# EAGLE board CT_schematic (EAGLE 7.6.0)

Size 100 x 80 mm. Coordinates in mm from the lower left corner, seen from the top.
Outline: 0,0 100,0 100,80 0,80 0,0
Copper layers (1*16): Top 0.035mm / dielectric 1.5mm / Bottom 0.035mm
Design rules "default": minimum track width 10mil, minimum drill 24mil, track to track 8mil, track to pad 8mil, pad to pad 8mil, via to via 8mil, smd to smd 8mil, copper to edge 40mil, drill to drill 8mil, minimum pad ring 10mil, minimum via ring 8mil, stop-mask expansion 4mil, vias tented up to drill 0mil, thermal gap 10mil

## Footprints (pad centres in the part's own frame; a part is rotated, then mirrored left to right if it is on the bottom)
C0603 = smd 0.8 x 0.8: 1 -0.762,0; 2 0.762,0
C0402 = smd 0.5 x 0.5: 1 -0.508,0; 2 0.508,0
C1210 = smd 1.2 x 2.5: 1 -1.524,0; 2 1.524,0
C0805 = smd 1.2 x 1.3: 1 -1.016,0; 2 1.016,0
EXV-9H = smd 3.505 x 1.676: 1 -2.857,0; 2 2.857,0
L1210 = smd 1.2 x 2.5: 1 -1.524,0; 2 1.524,0
PJ-037B_PACKAGE = drill 3.7 square: 1 12,0 | drill 3.2 square: 2 6,0
R0603 = smd 0.8 x 0.8: 1 -0.762,0; 2 0.762,0
LQFP64 = smd 0.3 x 1.2: 1 -3.75,-5.75; 2 -3.25,-5.75; 3 -2.75,-5.75; 4 -2.25,-5.75; 5 -1.75,-5.75; 6 -1.25,-5.75; 7 -0.75,-5.75; 8 -0.25,-5.75; 9 0.25,-5.75; 10 0.75,-5.75; 11 1.25,-5.75; 12 1.75,-5.75; 13 2.25,-5.75; 14 2.75,-5.75; 15 3.25,-5.75; 16 3.75,-5.75; 33 3.75,5.75; 34 3.25,5.75; 35 2.75,5.75; 36 2.25,5.75; 37 1.75,5.75; 38 1.25,5.75; 39 0.75,5.75; 40 0.25,5.75; 41 -0.25,5.75; 42 -0.75,5.75; 43 -1.25,5.75; 44 -1.75,5.75; 45 -2.25,5.75; 46 -2.75,5.75; 47 -3.25,5.75; 48 -3.75,5.75 | smd 1.2 x 0.3: 17 5.75,-3.75; 18 5.75,-3.25; 19 5.75,-2.75; 20 5.75,-2.25; 21 5.75,-1.75; 22 5.75,-1.25; 23 5.75,-0.75; 24 5.75,-0.25; 25 5.75,0.25; 26 5.75,0.75; 27 5.75,1.25; 28 5.75,1.75; 29 5.75,2.25; 30 5.75,2.75; 31 5.75,3.25; 32 5.75,3.75; 49 -5.75,3.75; 50 -5.75,3.25; 51 -5.75,2.75; 52 -5.75,2.25; 53 -5.75,1.75; 54 -5.75,1.25; 55 -5.75,0.75; 56 -5.75,0.25; 57 -5.75,-0.25; 58 -5.75,-0.75; 59 -5.75,-1.25; 60 -5.75,-1.75; 61 -5.75,-2.25; 62 -5.75,-2.75; 63 -5.75,-3.25; 64 -5.75,-3.75
SSOP-16 = smd 1.981 x 0.356: 1 -2.464,2.223; 2 -2.464,1.587; 3 -2.464,0.953; 4 -2.464,0.318; 5 -2.464,-0.318; 6 -2.464,-0.953; 7 -2.464,-1.587; 8 -2.464,-2.223; 9 2.464,-2.223; 10 2.464,-1.587; 11 2.464,-0.953; 12 2.464,-0.318; 13 2.464,0.318; 14 2.464,0.953; 15 2.464,1.587; 16 2.464,2.223
HTSS-105-01-G-D = drill 1 pad 1.8 square: 1 0,0 | drill 1 pad 1.8: 2 0,2.54; 3 2.54,0; 4 2.54,2.54; 5 5.08,0; 6 5.08,2.54; 7 7.62,0; 8 7.62,2.54; 9 10.16,0; 10 10.16,2.54
SOIC-8 = smd 1.6 x 0.6: 1 -2.7,1.905 | smd 1.55 x 0.6: 2 -2.7,0.635; 3 -2.7,-0.635; 4 -2.7,-1.905; 5 2.7,-1.905; 6 2.7,-0.635; 7 2.7,0.635; 8 2.7,1.905
182-009-MALE = drill 1.194 pad 1.524 octagon: 1 -5.537,10.923; 2 -2.769,10.923; 3 0,10.923; 4 2.769,10.923; 5 5.537,10.923; 6 -4.153,8.08; 7 -1.384,8.08; 8 1.384,8.08; 9 4.153,8.08 | hole 3.048: -12.446,9.501; 12.446,9.501
QFN-28 = smd 0.813 x 0.305: 1 -2.451,1.5; 2 -2.451,1; 3 -2.451,0.5; 4 -2.451,0; 5 -2.451,-0.5; 6 -2.451,-1; 7 -2.451,-1.5; 15 2.451,-1.5; 16 2.451,-1; 17 2.451,-0.5; 18 2.451,0; 19 2.451,0.5; 20 2.451,1; 21 2.451,1.5 | smd 0.305 x 0.813: 8 -1.5,-2.451; 9 -1,-2.451; 10 -0.5,-2.451; 11 0,-2.451; 12 0.5,-2.451; 13 1,-2.451; 14 1.5,-2.451; 22 1.5,2.451; 23 1,2.451; 24 0.5,2.451; 25 0,2.451; 26 -0.5,2.451; 27 -1,2.451; 28 -1.5,2.451 | smd 3.607 x 3.607: 29 0,0
SJ-43515TS-SMT-TR = smd 2.2 x 3: 1 0.6,-7.4; 4 3.4,-7.4 | smd 3 x 3: 2 12.8,-7.4; 5 17,-3 | smd 2 x 3: 3 5.3,0; 6 2.5,0 | drill 1.8: P$7 4.5,-3.69; P$8 11.54,-3.69
ABS07-32.768KHZ-7-T = smd 1.1 x 2.4: 1 -2.5,0; 2 0,0
ASFL1 = smd 1.7 x 1.5: 1 -1.27,-1.1; 2 1.27,-1.1; 3 1.27,1.1; 4 -1.27,1.1
SOIC-8_EP = smd 1.6 x 0.533: 1 -2.921,1.905; 2 -2.921,0.635; 3 -2.921,-0.635; 4 -2.921,-1.905; 5 2.921,-1.905; 6 2.921,-0.635; 7 2.921,0.635; 8 2.921,1.905 | smd 2.54 x 3.302: EPAD 0,0 | drill 0.406 pad 0.406: P$1 -0.508,0.635; P$2 0.381,0.635; P$3 -0.508,-0.635; P$4 0.381,-0.635
WSON-8 = smd 0.3 x 0.6: 1 -0.75,0; 2 0.05,0; 3 0.85,0; 4 1.65,0; 5 1.65,3.8; 6 0.85,3.8; 7 0.05,3.8; 8 -0.75,3.8 | smd 3 x 2.6: PAD 0.45,1.9
SON-6 = smd 0.55 x 0.3: 1 -0.355,0.5 | smd 0.52 x 0.3: 2 -0.37,0; 3 -0.37,-0.5; 4 0.37,-0.5; 5 0.37,0; 6 0.37,0.5
SW_4-1437565-2 = smd 1.4 x 2.1: 1 -2.23,4.55; 2 -2.23,-4.55; 3 2.23,4.55; 4 2.23,-4.55
LGM67K-G1J2-24-Z = smd 0.8 x 1.4: A -2,0; C 0,0
NC7SZ125M5X = smd 1.3 x 0.7: 1 -1.3,0.95; 2 -1.3,0; 3 -1.3,-0.95; 4 1.3,-0.95; 5 1.3,0.95
DUMMY_PACKAGE_176 = drill 0.3: 1 0,-1; 2 1.5,-1; 3 3,-1

## Placement (x,y rotation side)
C1  1e-06  [C0603]  -19.05,80.01 0 top  (outside the outline)
C2  1e-07  [C0603]  -22.86,80.01 0 top  (outside the outline)
C3  1e-07  [C0603]  -26.67,80.01 0 top  (outside the outline)
C4  1e-07  [C0603]  -30.48,80.01 0 top  (outside the outline)
C5  1e-07  [C0603]  -34.29,80.01 0 top  (outside the outline)
C6  1e-07  [C0603]  -38.1,80.01 0 top  (outside the outline)
C7  4.7e-06  [C0603]  -83.82,74.93 0 top  (outside the outline)
C8  1e-08  [C0603]  -41.91,80.01 0 top  (outside the outline)
C9  1e-06  [C0603]  -45.72,80.01 0 top  (outside the outline)
C10  1e-11  [C0402]  -26.67,85.09 0 top  (outside the outline)
C11  1e-11  [C0402]  -30.48,85.09 0 top  (outside the outline)
C12  1e-06  [C0603]  -49.53,80.01 0 top  (outside the outline)
C13  1e-06  [C0603]  -53.34,80.01 0 top  (outside the outline)
C14  2.2e-07  [C0603]  -15.24,80.01 0 top  (outside the outline)
C15  1e-06  [C0603]  -57.15,80.01 0 top  (outside the outline)
C16  1e-06  [C0603]  -60.96,80.01 0 top  (outside the outline)
C17  1e-06  [C0603]  -64.77,80.01 0 top  (outside the outline)
C18  1e-06  [C0603]  -68.58,80.01 0 top  (outside the outline)
C19  2.2e-05  [C1210]  -77.47,62.23 0 top  (outside the outline)
C20  2.2e-05  [C1210]  -83.82,62.23 0 top  (outside the outline)
C21  1e-09  [C0402]  -34.29,85.09 0 top  (outside the outline)
C22  1e-09  [C0402]  -38.1,85.09 0 top  (outside the outline)
C23  1e-07  [C0402]  -41.91,85.09 0 top  (outside the outline)
C24  1e-07  [C0402]  -45.72,85.09 0 top  (outside the outline)
C25  1e-07  [C0402]  -49.53,85.09 0 top  (outside the outline)
C26  1e-07  [C0402]  -53.34,85.09 0 top  (outside the outline)
C27  1e-07  [C0402]  -57.15,85.09 0 top  (outside the outline)
C28  1e-05  [C0805]  -59.69,68.58 0 top  (outside the outline)
C29  1e-05  [C0805]  -64.77,68.58 0 top  (outside the outline)
C30  1e-05  [C0805]  -69.85,68.58 0 top  (outside the outline)
C31  1e-05  [C0805]  -74.93,68.58 0 top  (outside the outline)
C32  1e-05  [C0805]  -80.01,68.58 0 top  (outside the outline)
C33  1e-08  [C0402]  -60.96,85.09 0 top  (outside the outline)
C34  1e-08  [C0402]  -64.77,85.09 0 top  (outside the outline)
C35  1e-05  [C1210]  -16.51,69.85 0 top  (outside the outline)
C36  1e-05  [C1210]  -22.86,69.85 0 top  (outside the outline)
C37  1e-05  [C1210]  -29.21,69.85 0 top  (outside the outline)
C38  1e-05  [C1210]  -35.56,69.85 0 top  (outside the outline)
C39  1e-06  [C0603]  -72.39,80.01 0 top  (outside the outline)
C40  1e-05  [C1210]  -41.91,69.85 0 top  (outside the outline)
C41  1e-07  [C0402]  -68.58,85.09 0 top  (outside the outline)
C42  0.0001  [EXV-9H]  -74.93,53.34 0 top  (outside the outline)
C43  0.0001  [EXV-9H]  -17.78,62.23 0 top  (outside the outline)
C44  1e-08  [C0402]  -72.39,85.09 0 top  (outside the outline)
I1  1e-05  [L1210]  -48.26,69.85 0 top  (outside the outline)
J1  PJ-037B  [PJ-037B_PACKAGE]  -55.88,29.21 0 top  (outside the outline)
R2  1000.0  [R0603]  -76.2,80.01 0 top  (outside the outline)
R4  4700.0  [R0603]  -80.01,80.01 0 top  (outside the outline)
R5  10000.0  [R0603]  -54.61,74.93 0 top  (outside the outline)
R6  100000.0  [R0603]  -24.13,74.93 0 top  (outside the outline)
R7  120.0  [R0603]  -83.82,80.01 0 top  (outside the outline)
R8  47000.0  [R0603]  -59.69,74.93 0 top  (outside the outline)
R9  47000.0  [R0603]  -64.77,74.93 0 top  (outside the outline)
R10  47000.0  [R0603]  -69.85,74.93 0 top  (outside the outline)
R11  680.0  [R0603]  -15.24,85.09 0 top  (outside the outline)
R12  4031.5447154472  [R0603]  -19.05,74.93 0 top  (outside the outline)
R13  2200.0  [R0603]  -19.05,85.09 0 top  (outside the outline)
R14  100000.0  [R0603]  -29.21,74.93 0 top  (outside the outline)
R15  300000.0  [R0603]  -34.29,74.93 0 top  (outside the outline)
R16  100000.0  [R0603]  -39.37,74.93 0 top  (outside the outline)
R17  10000.0  [R0603]  -74.93,74.93 0 top  (outside the outline)
R18  10000.0  [R0603]  -80.01,74.93 0 top  (outside the outline)
R19  9100.0  [R0603]  -22.86,85.09 0 top  (outside the outline)
R20  680000.0  [R0603]  -44.45,74.93 0 top  (outside the outline)
R21  120000.0  [R0603]  -49.53,74.93 0 top  (outside the outline)
U1  STM32L431RBT6  [LQFP64]  -68.58,29.21 0 top  (outside the outline)
U2  LTC2804CGN-1#PBF  [SSOP-16]  -48.26,41.91 0 top  (outside the outline)
U3  HTSS-105-01-G-D  [HTSS-105-01-G-D]  -67.31,40.64 0 top  (outside the outline)
U4  MCP2562-E/SN  [SOIC-8]  -80.01,41.91 0 top  (outside the outline)
U5  182-009-113R531  [182-009-MALE]  -36.83,6.35 0 top  (outside the outline)
U6  WM8731CLSEFL  [QFN-28]  -69.85,62.23 0 top  (outside the outline)
U7  SJ-43515TS-SMT-TR  [SJ-43515TS-SMT-TR]  -78.74,10.16 0 top  (outside the outline)
U8  SJ-43515TS-SMT-TR  [SJ-43515TS-SMT-TR]  -39.37,31.75 0 top  (outside the outline)
U9  ABS07-32.768KHZ-7-T  [ABS07-32.768KHZ-7-T]  -39.37,62.23 0 top  (outside the outline)
U10  ASFL1-12.288MHZ-EC-T  [ASFL1]  -49.53,53.34 0 top  (outside the outline)
U11  ASFL1-25MHZ-NCS  [ASFL1]  -66.04,53.34 0 top  (outside the outline)
U12  MIC5234YME  [SOIC-8_EP]  -48.26,60.96 0 top  (outside the outline)
U13  LP2951ACSDX/NOPB  [WSON-8]  -29.21,52.07 0 top  (outside the outline)
U14  TPS3895ADRYR  [SON-6]  -81.28,83.82 0 top  (outside the outline)
U15  4-1437565-2  [SW_4-1437565-2]  -27.94,43.18 0 top  (outside the outline)
U16  Q65110A2395  [LGM67K-G1J2-24-Z]  -57.15,62.23 0 top  (outside the outline)
U17  nc7sz125m5x  [NC7SZ125M5X]  -53.34,68.58 0 top  (outside the outline)
U18  Dummy  [DUMMY_PACKAGE_176]  -78.74,85.09 0 top  (outside the outline)

## Library data of the parts
C1-C44 I1 J1 R2 R4-R21 U1-U18 = circuit_tree

## Nets
CLK_CRYSTAL_U1_3: C10.1 U1.3 U9.1
CLK_CRYSTAL_U1_4: C11.1 U1.4 U9.2
CLK_U1_5: U1.5 U11.3
CLK_U6_1: U6.1 U10.3
GND: C1.2 C2.2 C3.2 C4.2 C5.2 C6.2 C7.2 C8.2 C9.2 C10.2 C11.2 C12.2 C13.2 C15.2 C16.2 C17.2 C18.2 C22.2 C23.2 C24.2 C25.2 C26.2 C27.2 C28.2 C29.2 C30.2 C31.2 C32.2 C33.2 C34.2 C35.2 C36.2 C37.2 C38.2 C39.2 C40.2 C41.2 C42.2 C43.2 C44.2 J1.2 R2.2 R5.2 R8.2 R9.2 R10.2 R13.2 R16.2 R19.2 R21.2 U1.12 U1.18 U1.31 U1.47 U1.63 U2.8 U3.9 U4.2 U4.8 U5.5 U6.4 U6.15 U6.19 U6.25 U6.26 U6.29 U7.1 U8.1 U10.2 U11.2 U12.7 U12.EPAD U13.3 U13.4 U13.PAD U14.2 U16.C U17.1 U17.3 U18.1
NET_U1_7: R4.1 U1.7 U17.4
NET_U1_60: R5.1 U1.60
NET_U1_61: U16.A
NET_U1_62: U15.3 U15.4
NET_U2_6: C12.1 U2.6
NET_U2_7: C14.1 I1.2 U2.7
NET_U2_9: C13.1 U2.9
NET_U2_10: C14.2 U2.10
NET_U2_11: R6.1 U2.11
NET_U3_3: U2.1 U3.3
NET_U3_4: U2.2 U3.4
NET_U3_5: U2.3 U3.5
NET_U3_6: U2.4 U3.6
NET_U4_6: R7.2 U4.6
NET_U5_2: R7.2 U4.6 U5.2
NET_U5_3: R7.1 U4.7 U5.3
NET_U6_9: U6.9
NET_U6_20: C27.1 C32.1 U6.20
NET_U7_2: C20.1 R9.1 U7.2
NET_U7_5: C19.1 R8.1 U7.5
NET_U7_13: C19.2
NET_U7_14: C20.2
NET_U8_5: C21.1 C22.1 R10.1 R11.1 U8.5
NET_U8_21: R11.2
NET_U8_22: C21.2
NET_U12_4: R12.2 R13.1 U12.4
NET_U13_5: R14.1 U13.5
NET_U13_7: R15.2 R16.1 U13.7
NET_U14_1: R18.1 R19.1 U14.1
NET_U14_3: R20.2 R21.1 U14.3
NET_U14_4: R17.1 U14.4 U17.2
NET_U15_1: R2.1 U15.1 U15.2
PROC_ADC1_IN3: U1.10 U18.2
PROC_ADC1_IN10: U1.21 U18.3
PROC_CAN1_RX: U1.44 U4.4
PROC_CAN1_TX: U1.45 U4.1
PROC_LPUART1_CTS: U1.22 U2.13
PROC_LPUART1_RTS: U1.27 U2.15
PROC_LPUART1_RX: U1.8 U2.16
PROC_LPUART1_TX: U1.9 U2.14
PROC_SAI1_FS_A: U1.33 U6.9 U6.11
PROC_SAI1_SCK_A: U1.29 U6.7
PROC_SAI1_SD_A: U1.11 U6.8
VCC_S1_9V5: C35.1 C36.1 C39.1 C42.1 C43.1 J1.1 U12.5 U12.8 U13.8
VCC_TIER1_3V3: C1.1 C2.1 C3.1 C4.1 C5.1 C6.1 C7.1 C8.1 C9.1 C15.1 C16.1 C18.1 C23.1 C24.1 C25.1 C26.1 C28.1 C29.1 C30.1 C31.1 C33.1 C34.1 C37.1 C38.1 C41.1 C44.1 I1.1 R4.2 R6.2 R12.1 R17.2 R18.2 R20.1 U1.1 U1.13 U1.19 U1.32 U1.48 U1.64 U2.5 U2.12 U4.5 U6.3 U6.5 U6.12 U6.18 U10.4 U11.4 U12.1 U14.6 U17.5
VCC_TIER1_5V0: C17.1 C40.1 R14.2 R15.1 U4.3 U13.1

## Tracks (layer width: path | path; a pad name or v marks a point on that pad's centre or on a via)
CLK_CRYSTAL_U1_3  (2 unrouted)
CLK_CRYSTAL_U1_4  (2 unrouted)
CLK_U1_5  (1 unrouted)
CLK_U6_1  (1 unrouted)
GND  (79 unrouted)
NET_U1_7  (2 unrouted)
NET_U1_60  (1 unrouted)
NET_U1_62  (1 unrouted)
NET_U2_6  (1 unrouted)
NET_U2_7  (2 unrouted)
NET_U2_9  (1 unrouted)
NET_U2_10  (1 unrouted)
NET_U2_11  (1 unrouted)
NET_U3_3  (1 unrouted)
NET_U3_4  (1 unrouted)
NET_U3_5  (1 unrouted)
NET_U3_6  (1 unrouted)
NET_U4_6  (1 unrouted)
NET_U5_2  (2 unrouted)
NET_U5_3  (2 unrouted)
NET_U6_20  (2 unrouted)
NET_U7_2  (2 unrouted)
NET_U7_5  (2 unrouted)
NET_U8_5  (4 unrouted)
NET_U12_4  (2 unrouted)
NET_U13_5  (1 unrouted)
NET_U13_7  (2 unrouted)
NET_U14_1  (2 unrouted)
NET_U14_3  (2 unrouted)
NET_U14_4  (2 unrouted)
NET_U15_1  (2 unrouted)
PROC_ADC1_IN3  (1 unrouted)
PROC_ADC1_IN10  (1 unrouted)
PROC_CAN1_RX  (1 unrouted)
PROC_CAN1_TX  (1 unrouted)
PROC_LPUART1_CTS  (1 unrouted)
PROC_LPUART1_RTS  (1 unrouted)
PROC_LPUART1_RX  (1 unrouted)
PROC_LPUART1_TX  (1 unrouted)
PROC_SAI1_FS_A  (2 unrouted)
PROC_SAI1_SCK_A  (1 unrouted)
PROC_SAI1_SD_A  (1 unrouted)
VCC_S1_9V5  (8 unrouted)
VCC_TIER1_3V3  (50 unrouted)
VCC_TIER1_5V0  (5 unrouted)